# Altium PCB summing_circuit.PcbDoc
Units mm, origin at the board's own origin, x right, y up, seen from the top; angles counter-clockwise.
Board outline 127.77 x 76.7 mm, 2 copper layers (Top Layer, Bottom Layer); 101 components, 162 nets, 288 pads, 15 vias.
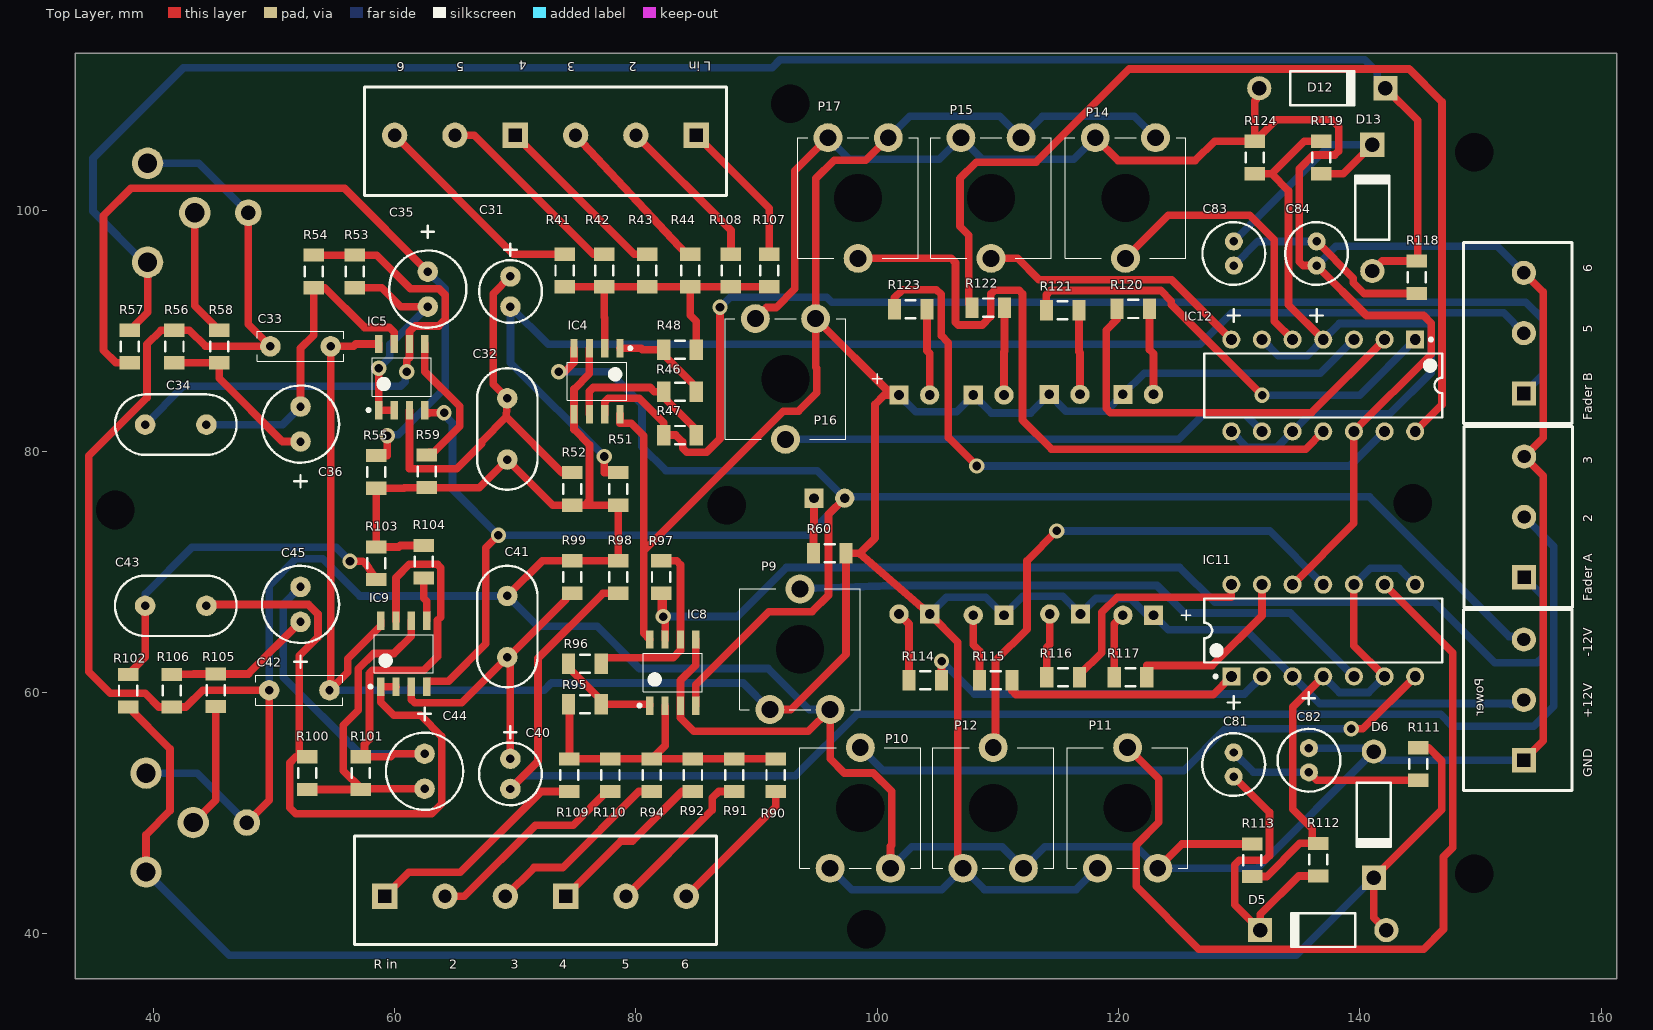
[diagram p0: Top Layer view]
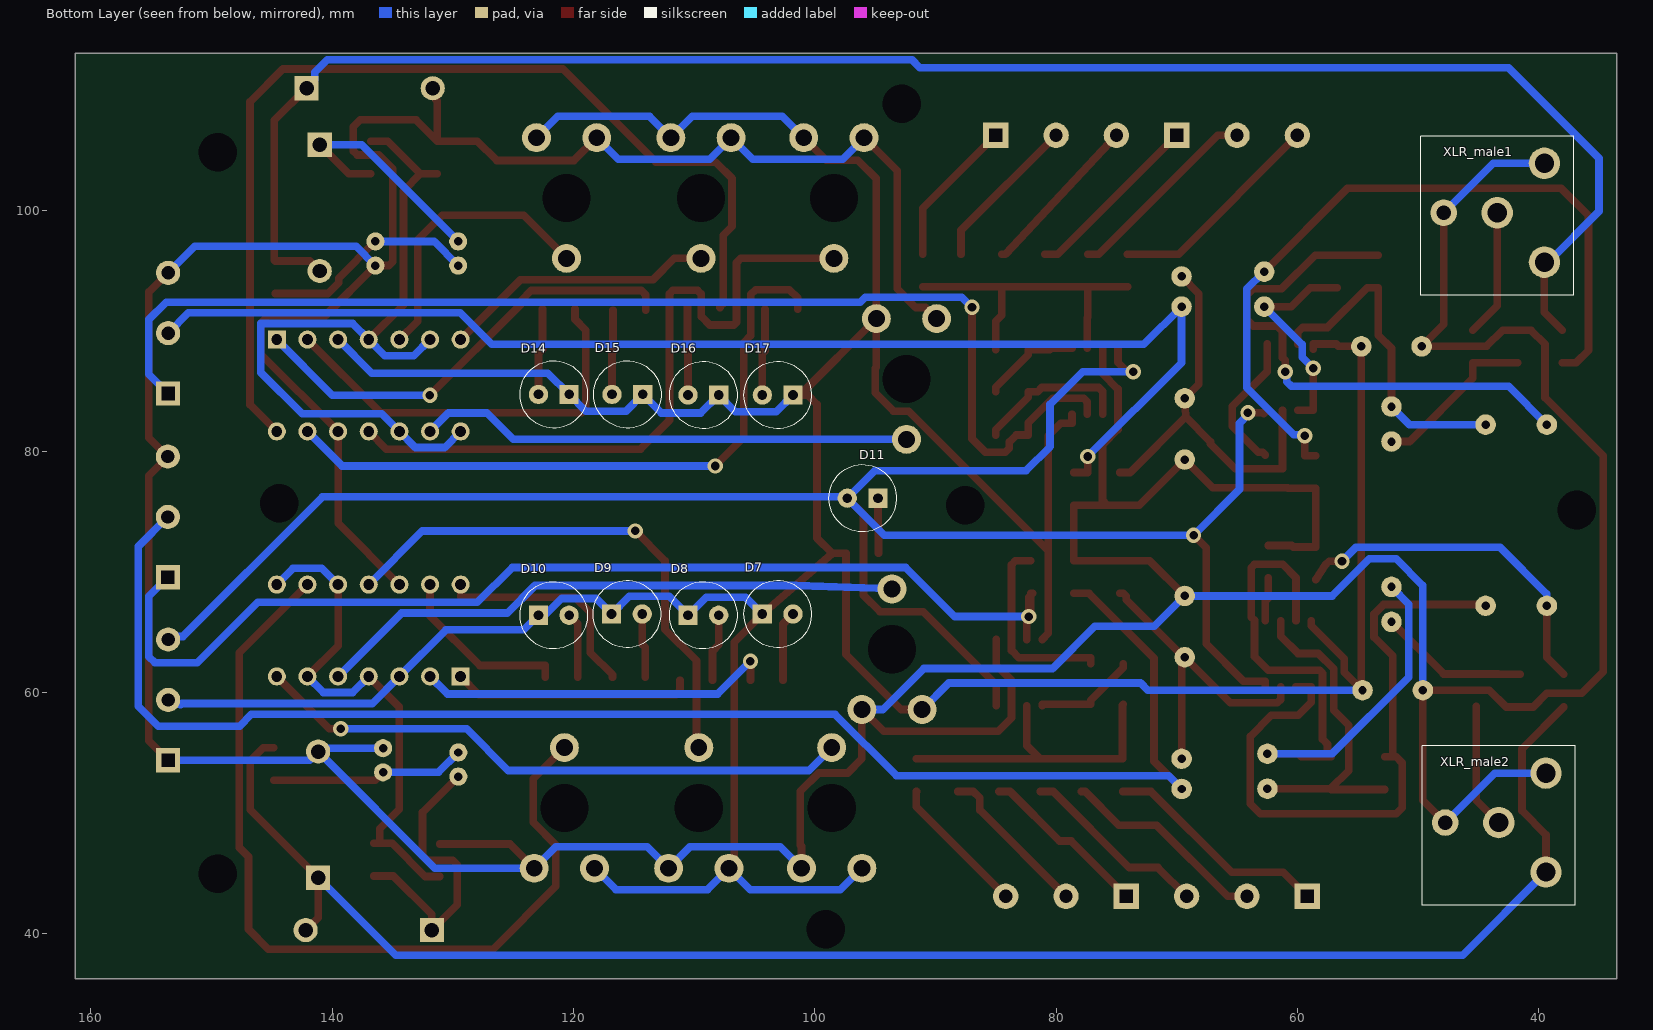
[diagram p1: Bottom Layer view, seen from below]

## Layer stack, top to bottom
Top Solder: solder mask 0.0102, Solder Resist, Dk 3.5
Top Layer: signal copper 0.0356
Dielectric 1: dielectric 0.32, FR-4, Dk 4.8
Bottom Layer: signal copper 0.0356
Bottom Solder: solder mask 0.0102, Solder Resist, Dk 3.5

## Board outline
33.528,113 161.3,113 161.3,36.3 33.528,36.3

## Design rules (kind name [scope] priority, off if disabled: settings)
Clearance [All] p1: gap=0.254 ignorepadtopadclearanceinfootprint=FALSE except(0: Arc-Hole Track-Hole SMDPad-Hole THPad-Hole Via-Hole Fill-Hole Poly-Hole Region-Hole Text-Hole)
Height [All] p1: minheight=0 maxheight=100 prefheight=12.7
HoleSize [All] p1: absolutevalues=TRUE maxlimit=5.08 minlimit=0.025 maxpercent=80.000 minpercent=20.000
PolygonConnect [All] p1: connectstyle=Relief reliefconductorwidth=0.254 reliefentries=4 polygonreliefangle="90 Angle" airgapwidth=0.254
RoutingVias [All] p1: holewidth=0.711 width=1.27 viastyle="Through Hole" minholewidth=0.711 minwidth=1.27 maxholewidth=0.711 maxwidth=1.27
SolderMaskExpansion [All] p1: expansion=0.102 istentingtop=FALSE
Width [All] p1: maxlimit=1.27 minlimit=0.254 preferedwidth=0.635 minimp=50.000000 maximp=50.000000 favimp=50.000000
28 further rules are at their usual default settings.

## Classes and differential pairs
component class summing_circuit: C31 C32 C33 C34 C35 C36 C40 C41 C42 C43 C44 C45 D11 IC4 IC5 IC8 IC9 "L in" Power R41 R42 R43 R44 R46 R47 R48 R51 R52 R53 R54 R55 R56 R57 R58 R59 R60 R90 R91 R92 R94 R95 R96 R97 R98 R99 R100 R101 R102 R103 R104 R105 R106 R107 R108 R109 R110 "R in" XLR_male1 XLR_male2
component class power_SUP: C81 C82 C83 C84 D5 D6 D7 D8 D9 D10 D12 D13 D14 D15 D16 D17 IC11 IC12 P9 P10 P11 P12 P14 P15 P16 P17 R111 R112 R113 R114 R115 R116 R117 R118 R119 R120 R121 R122 R123 R124

## Components (designator, comment, footprint, x,y, rotation, side; value= is the part's Value field where it differs from the comment)
C31 "Cap" "CAPACITOR 10UF" 69.6,92 r90 top value=10uF
C32 "Cap" "CAPACITOR 100PF" 69.34,79.321 r90 top value=100pF
C33 "Cap" "CAPACITOR 22NF, 47NF, 100NF" 49.7,88.7 r0 top value=100nF
C34 "Cap" "CAPACITOR 100PF" 39.32,82.219 r0 top value=100pF
C35 "Cap" "CAPACITOR 100UF" 62.748,92 r90 top value=22uF
C36 "Cap" "CAPACITOR 100UF" 52.2,83.714 r270 top value=22uF
C40 "Cap" "CAPACITOR 10UF" 69.594,52.016 r90 top value=10uF
C41 "Cap" "CAPACITOR 100PF" 69.34,68.018 r270 top value=100pF
C42 "Cap" "CAPACITOR 22NF, 47NF, 100NF" 49.6,60.2 r0 top value=100nF
C43 "Cap" "CAPACITOR 100PF" 44.4,67.2 r180 top value=100pF
C44 "Cap" "CAPACITOR 100UF" 62.482,52.037 r90 top value=100pF
C45 "Cap" "CAPACITOR 100UF" 52.2,68.768 r270 top value=22uF
C81 "Cap Pol2" "CAPACITOR 47UF" 129.548,53.042 r90 top value=47uF
C82 "Cap Pol2" "CAPACITOR 47UF" 135.784,53.396 r90 top value=47uF
C83 "Cap Pol2" "CAPACITOR 47UF" 129.561,97.401 r270 top value=47uF
C84 "Cap Pol2" "CAPACITOR 47UF" 136.419,97.401 r270 top value=47uF
D5 "Diode 1N4007" DO-41 136.973,40.318 r180 top
D6 "Diode 1N4007" DO-41 141.164,49.892 r270 top
D7 "LED1" LED 104.347,66.521 r180 bottom
D8 "LED1" LED 110.507,66.421 r180 bottom
D9 "LED1" LED 116.847,66.521 r180 bottom
D10 "LED1" LED 122.907,66.421 r180 bottom
D11 "LED1" LED 94.767,76.121 r0 bottom
D12 "Diode 1N4007" DO-41 136.9,110.1 r0 top
D13 "Diode 1N4007" DO-41 141.037,100.181 r90 top
D14 "LED1" LED 120.367,84.721 r0 bottom
D15 "LED1" LED 114.267,84.721 r0 bottom
D16 "LED1" LED 107.967,84.672 r0 bottom
D17 "LED1" LED 101.807,84.672 r0 bottom
"Fader A" "RPot" header_3 153.627,69.569 r90 top value=47k (schematic designator P2_5B)
"Fader B" "RPot" header_3 153.6,84.8 r90 top value=47k (schematic designator P2_5A)
IC4 "LM833DR2G" OPAMP_LM833 76.78,85.811 r270 top
IC5 "LM833DR2G" OPAMP_LM833 60.595,86.16 r90 top
IC8 "LM833DR2G" OPAMP_LM833 83.056,61.668 r90 top
IC9 "LM833DR2G" OPAMP_LM833 60.751,63.234 r90 top
IC11 "LM339N" OPAMP_LM339 136.973,65.152 r90 top
IC12 "LM339N" OPAMP_LM339 136.973,85.462 r270 top
"L in" "Header 6" HEADER_6 85,106.2 r180 top (schematic designator "PIN 14")
P9 "RPot" TRIMMER 93.6,63.6 r0 top value=47K
P10 "RPot" TRIMMER 98.6,50.446 r0 top value=47K
P11 "RPot" TRIMMER 120.756,50.446 r0 top value=47K
P12 "RPot" TRIMMER 109.617,50.446 r0 top value=47K
P14 "RPot" TRIMMER 120.574,101 r180 top value=47K
P15 "RPot" TRIMMER 109.435,101 r180 top value=47K
P16 "RPot" TRIMMER 92.4,86 r180 top value=47K
P17 "RPot" TRIMMER 98.418,101 r180 top value=47K
Power "Header 3" HEADER_3 153.6,54.4 r90 top (schematic designator "PIN 13")
R41 "Res2" C1206 74.082,95.001 r270 top value=1K
R42 "Res2" C1206 77.384,95.001 r270 top value=1K
R43 "Res2" C1206 80.94,95.001 r270 top value=1K
R44 "Res2" C1206 84.496,95.001 r270 top value=1K
R46 "Res2" C1206 83.662,84.938 r180 top value=1K
R47 "Res2" C1206 83.662,81.353 r180 top value=1K
R48 "Res2" C1206 83.662,88.436 r180 top value=10K
R51 "Res2" C1206 78.531,76.893 r90 top value=100K
R52 "Res2" C1206 74.721,76.893 r90 top value=10K
R53 "Res2" C1206 56.689,94.921 r90 top value=10K
R54 "Res2" C1206 53.294,94.921 r270 top value=10K
R55 "Res2" C1206 58.465,78.3 r90 top value=100K
R56 "Res2" C1206 41.748,88.7 r270 top value=100K
R57 "Res2" C1206 38.034,88.7 r90 top value=150
R58 "Res2" C1206 45.462,88.7 r90 top value=150
R59 "Res2" C1206 62.656,78.347 r90 top value=4k7
R60 "Res2" C1206 96.069,71.567 r180 top value=2k7
R90 "Res2" C1206 91.573,53.159 r90 top value=1K
R91 "Res2" C1206 88.152,53.159 r90 top value=1K
R92 "Res2" C1206 84.732,53.159 r90 top value=1K
R94 "Res2" C1206 81.311,53.159 r90 top value=1K
R95 "Res2" C1206 75.771,59.043 r0 top value=10K
R96 "Res2" C1206 75.771,62.41 r0 top value=1K
R97 "Res2" C1206 82.087,69.584 r270 top value=1K
R98 "Res2" C1206 78.531,69.584 r270 top value=100K
R99 "Res2" C1206 74.721,69.584 r270 top value=10K
R100 "Res2" C1206 52.75,53.328 r270 top value=10K
R101 "Res2" C1206 57.195,53.328 r90 top value=10K
R102 "Res2" C1206 37.907,60.164 r270 top value=150
R103 "Res2" C1206 58.465,70.727 r270 top value=100K
R104 "Res2" C1206 62.402,70.854 r270 top value=4k7
R105 "Res2" C1206 45.171,60.2 r270 top value=150
R106 "Res2" C1206 41.539,60.164 r90 top value=100K
R107 "Res2" C1206 91.054,95.001 r270 top value=1K
R108 "Res2" C1206 87.879,95.001 r270 top value=1K
R109 "Res2" C1206 74.469,53.159 r90 top value=1K
R110 "Res2" C1206 77.89,53.159 r90 top value=1K
R111 "Res2" C1206 144.847,54.083 r270 top value=10
R112 "Res2" C1206 136.549,46.156 r90 top value=100K
R113 "Res2" C1206 131.088,46.109 r90 top value=27k
R114 "Res2" C1206 103.985,61.023 r0 top value=470
R115 "Res2" C1206 109.827,61.023 r180 top value=470
R116 "Res2" C1206 115.415,61.277 r180 top value=470
R117 "Res2" C1206 121.003,61.277 r180 top value=470
R118 "Res2" C1206 144.72,94.431 r270 top value=10
R119 "Res2" C1206 136.817,104.363 r90 top value=100K
R120 "Res2" C1206 121.225,91.802 r180 top value=470
R121 "Res2" C1206 115.374,91.691 r0 top value=470
R122 "Res2" C1206 109.207,91.921 r0 top value=470
R123 "Res2" C1206 102.775,91.776 r0 top value=470
R124 "Res2" C1206 131.282,104.363 r90 top value=27k
"R in" "Header 6" HEADER_6 59.177,43.122 r0 top (schematic designator "PIN 15")
XLR_male1 "XLR_male" XLR_MALE_NEUTRIK_NC3_MAV 39.624,99.779 r270 bottom
XLR_male2 "XLR_male" XLR_MALE_NEUTRIK_NC3_MAV 39.497,49.233 r270 bottom

## Footprints (in the part's own frame and the unit in brackets; to place one, negate y for a bottom-side part, rotate by r counter-clockwise, add the part's x,y. Pads: shape width x height; smd on the part's side, far side on the other; paste and mask are expansions set on the pad)
C1206 [mm] "Chip Capacitor, Body 3.2x1.6mm, IPC High Density"
  rect 1.1x1.7 smd: 1(-1.35,0) 2(1.35,0)
  silkscreen extent -0.4,-0.75 0.4,0.75, body extent -1.7,-0.9 1.7,0.9, height 1.3
"CAPACITOR 10UF" [mm]
  round 1.7 hole 0.7: 1(0,0) 2(2.5,0)
  silkscreen extent -1.35,-2.6 5.21,2.6
"CAPACITOR 22NF, 47NF, 100NF" [mm]
  round 1.7 hole 0.7: 1(0,0) 2(5,0)
  silkscreen extent -1.1,-1.25 6.1,1.25
"CAPACITOR 47UF" [mm]
  round 1.5 hole 0.7: 1(0,0) 2(2,0)
  silkscreen extent -1.6,-2.6 6.65,2.6
"CAPACITOR 100PF" [mm]
  round 1.7 hole 0.7: 1(0,0) 2(5.08,0)
  silkscreen extent -2.5,-2.5 7.58,2.5
"CAPACITOR 100UF" [mm]
  round 1.7 hole 0.7: 1(0,0) 2(2.9,0)
  silkscreen extent -1.75,-3.2 6.71,3.2
DO-41 [mm] "Diode, Axial; Body 5.2 x 2.7 mm (LxDia. max), Lead Dia. 0.86 mm (max)"
  round 2 hole 1.2: 1(-5.23,0)
  rect 2x2 hole 1.2: 2(5.23,0)
  silkscreen extent -2.65,-1.4 2.75,1.4
header_3 [mm]
  rect 2x2 hole 1.1 square: 1(0,0)
  round 2 hole 1.1: 2(5,0) 3(10,0)
  silkscreen extent -2.5,-4 12.5,5, body extent -2.65,-4 12.5,4, height 10
HEADER_3 [mm]
  rect 2x2 hole 1.1 square: 1(0,0)
  round 2 hole 1.1: 2(5,0) 3(10,0)
  silkscreen extent -2.5,-4 12.5,5, body extent -2.65,-4 12.5,4, height 10
HEADER_6 [mm]
  rect 2.1x2.1 hole 1.1 square: 1(0,0) 4(15,0)
  round 2.1 hole 1.1: 2(5,0) 3(10,0) 5(20,0) 6(25,0)
  silkscreen extent -2.5,-4 27.5,5, body extent -2.65,-4 27.5,4, height 10
LED [mm]
  rect 1.6x1.6 hole 0.8: 1(0,0)
  round 1.6 hole 0.8: 2(2.54,0)
  silkscreen extent -1.52,-2.79 4.06,2.79, body extent -1.66,-2.93 3.65,2.93, height 14.18
OPAMP_LM339 [mm] "DIP, 14-Leads, Body 19.7x6.6mm, Pitch 2.54mm"
  rect 1.5x1.5 hole 0.9: 1(-3.81,7.62)
  round 1.5 hole 0.9: 2(-3.81,5.08) 3(-3.81,2.54) 4(-3.81,0) 5(-3.81,-2.54) 6(-3.81,-5.08) 7(-3.81,-7.62) 8(3.81,-7.62) 9(3.81,-5.08) 10(3.81,-2.54) 11(3.81,0) 12(3.81,2.54) 13(3.81,5.08) 14(3.81,7.62)
  silkscreen extent -3.93,-9.85 2.65,9.85, body extent -3.95,-9.85 3.95,9.85, height 5.08
OPAMP_LM833 [mm] "SOIC, 8-Leads, Body 4.9x3.9mm, Pitch 1.27mm"
  rect 1.52x0.6 smd: 1(-2.74,1.905) 2(-2.74,0.635) 3(-2.74,-0.635) 4(-2.74,-1.905) 5(2.74,-1.905) 6(2.74,-0.635) 7(2.74,0.635) 8(2.74,1.905)
  silkscreen extent -2.86,-2.45 1.58,2.88, body extent -1.95,-2.45 1.95,2.45, height 1.75
TRIMMER [mm]
  round 2.4 hole 1.4: 1(-2.5,-5) 2(2.5,-5) 3(0,5)
  round 0 hole 4 unplated: ""(0,0)
  silkscreen extent -5,-5 5,5, body extent -5.15,-5.15 5.15,5.15, height 6.1
XLR_MALE_NEUTRIK_NC3_MAV [mm]
  round 2.6 hole 1.6: 1(-4.1,0.1) 2(4.1,0.1) 3(0,-3.81)
  round 2.2 hole 1.2: 1(0,-8.25)
  silkscreen extent -6.35,-10.16 6.86,2.54, body extent -12.55,-14.67 12.45,12.63, height 27.21

## Part data
C31 C32 C34 C35 C40 C41 C43 C44: "Capacitor", LatestRevisionDate=17-Jul-2002, LatestRevisionNote="Re-released for DXP Platform.", PackageDescription="Radial Cap, Thru-Hole; 2 Leads; 0.3 in Pin Spacing", PackageReference=RAD-0.3, Published=8-Jun-2000, Publisher="Altium Limited"
C33 C42: library part Cap_3, "Capacitor", LatestRevisionDate=17-Jul-2002, LatestRevisionNote="Re-released for DXP Platform.", PackageDescription="Radial Cap, Thru-Hole; 2 Leads; 0.3 in Pin Spacing", PackageReference=RAD-0.3, Published=8-Jun-2000, Publisher="Altium Limited"
C36 C45: library part Cap_5, "Capacitor", LatestRevisionDate=17-Jul-2002, LatestRevisionNote="Re-released for DXP Platform.", PackageDescription="Radial Cap, Thru-Hole; 2 Leads; 0.3 in Pin Spacing", PackageReference=RAD-0.3, Published=8-Jun-2000, Publisher="Altium Limited"
C81 C82 C83 C84: "electrolytic", LatestRevisionDate=17-Jul-2002, LatestRevisionNote="Re-released for DXP Platform.", PackageDescription="Polarized Capacitor; 2 Leads", PackageReference=POLAR0.8, Published=8-Jun-2000, Publisher="Altium Limited"
D5 D6 D12 D13: "1 Amp General Purpose Rectifier", Code_JEDEC=DO-204-AL, ComponentLink1Description="Manufacturer Link", ComponentLink1URL=http://www.fairchildsemi.com/, ComponentLink2Description=Datasheet, ComponentLink2URL=http://www.fairchildsemi.com/ds/1N%2F1N4001.pdf, DatasheetVersion=1998, LatestRevisionDate=17-Jul-2002, LatestRevisionNote="Re-released for DXP Platform.", PackageDescription="Diode, Axial; Body 5.2 x 2.7 mm (LxDia. max), Lead Dia. 0.86 mm (max)", PackageReference=DO-41, PackageVersion=Aug-1999, Published=8-Jun-2000, Publisher="Altium Limited"
D7 D8 D9 D10 D11 D14 D15 D16 D17: "Typical RED GaAs LED", LatestRevisionDate=08-Jul-2005, LatestRevisionNote="Mech Layer 1 removed.", PackageDescription="LED; 2 Leads", PackageReference=LED-1, Published=8-Jun-2000, Publisher="Altium Limited"
"Fader A" "Fader B": "Potentiometer", LatestRevisionDate=17-Jul-2002, LatestRevisionNote="Re-released for DXP Platform.", PackageDescription="Variable Resistor, Thru-Hole; 3 Leads", PackageReference=VR5, Published=8-Jun-2000, Publisher="Altium Limited", Set Position=0.5, Sim Note="Enter the Resistance value and the set point into parameter fields."
IC4 IC5 IC8 IC9: library part opamp_LM833, "Low Noise, Audio Dual Operational Amplifier, -40 to 85 degC, 8-Pin SOIC, Pb-Free, Tape and Reel", Manufacturer="On Semiconductor", ComponentLink1Description="Manufacturer URL", ComponentLink1URL=http://www.onsemi.com/, ComponentLink2Description=Datasheet, ComponentLink2URL=http://www.onsemi.cn/pub_link/Collateral/LM833-D.PDF, ComponentLink3Description="Package Specification", ComponentLink3URL=http://www.onsemi.com/pub_link/Collateral/751-07.PDF, DatasheetVersion="Rev. 6", GBW Typ (MHz)=15, Mounting Technology="Surface Mount", PackageDescription="8-Pin Small Outline Integrated Circuit, Body 4.9 x 3.9 mm, Pitch 1.27 mm", PackageReference=SOIC-8-751-07, PackageVersion="Rev. AK, 02/2011", Packing="Tape and Reel", PartNumber=LM833DR2G, RoHS=TRUE, SR Typ (V/uS)=7
IC11 IC12: library part opamp_LM339, "Low Power Low Offset Voltage Quad Comparator, 14-pin MDIP", Manufacturer="Texas Instruments", Package Reference=N0014A, PackageTopMarking=NSUZXYYTTE#*LM339N, PowerWise=N, Code_JEDEC=MS-001-AA, ComponentLink1Description="Datasheet URL", ComponentLink1URL=http://www.ti.com/general/docs/lit/getliterature.tsp?genericPartNumber=LM339&fileType=pdf, CompType=Amplifiers, PackageDescription="MDIP, .750 x .250 x.130in, 14 Lead, .100in Pitch", PinCount=14, RoHS=N
"L in" "R in": "Header, 6-Pin", LatestRevisionDate=17-Jul-2002, LatestRevisionNote="Re-released for DXP Platform.", Publisher="Altium Limited"
P9 P10 P11 P12 P14 P15 P16 P17: library part RPot_1, "Potentiometer", LatestRevisionDate=17-Jul-2002, LatestRevisionNote="Re-released for DXP Platform.", PackageDescription="Variable Resistor, Thru-Hole; 3 Leads", PackageReference=VR5, Published=8-Jun-2000, Publisher="Altium Limited", Set Position=0.5, Sim Note="Enter the Resistance value and the set point into parameter fields."
Power: "Header, 3-Pin", LatestRevisionDate=17-Jul-2002, LatestRevisionNote="Re-released for DXP Platform.", Publisher="Altium Limited"
R41 R42 R43 R44 R46 R47 R57 R58 R59 R90 R91 R92 R94 R96 R97 R102 R104 R105 R107 R108 R109 R110 R113 R124: "Resistor", LatestRevisionDate=17-Jul-2002, LatestRevisionNote="Re-released for DXP Platform.", PackageDescription="Axial Device, Thru-Hole; 2 Leads; 0.4 in Pin Spacing", PackageReference=AXIAL-0.4, Published=8-Jun-2000, Publisher="Altium Limited"
R48 R52 R53 R54 R95 R99 R100 R101: library part Res2_3, "Resistor", LatestRevisionDate=17-Jul-2002, LatestRevisionNote="Re-released for DXP Platform.", PackageDescription="Axial Device, Thru-Hole; 2 Leads; 0.4 in Pin Spacing", PackageReference=AXIAL-0.4, Published=8-Jun-2000, Publisher="Altium Limited"
R51 R55 R56 R98 R103 R106 R112 R119: library part Res2_5, "Resistor", LatestRevisionDate=17-Jul-2002, LatestRevisionNote="Re-released for DXP Platform.", PackageDescription="Axial Device, Thru-Hole; 2 Leads; 0.4 in Pin Spacing", PackageReference=AXIAL-0.4, Published=8-Jun-2000, Publisher="Altium Limited"
R60: library part Res_16, "Resistor", LatestRevisionDate=17-Jul-2002, LatestRevisionNote="Re-released for DXP Platform.", PackageDescription="Axial Device, Thru-Hole; 2 Leads; 0.4 in Pin Spacing", PackageReference=AXIAL-0.4, Published=8-Jun-2000, Publisher="Altium Limited"
R111 R118: library part Res2_2, "Resistor", LatestRevisionDate=17-Jul-2002, LatestRevisionNote="Re-released for DXP Platform.", PackageDescription="Axial Device, Thru-Hole; 2 Leads; 0.4 in Pin Spacing", PackageReference=AXIAL-0.4, Published=8-Jun-2000, Publisher="Altium Limited"
R114 R115 R116 R117 R120 R121 R122 R123: library part Res2_13, "Resistor", LatestRevisionDate=17-Jul-2002, LatestRevisionNote="Re-released for DXP Platform.", PackageDescription="Axial Device, Thru-Hole; 2 Leads; 0.4 in Pin Spacing", PackageReference=AXIAL-0.4, Published=8-Jun-2000, Publisher="Altium Limited"

## Free pads (board coordinates)
  round 1.524 hole 3.2 unplated: 7(149.5,45) 9(149.5,104.8) 14(99.1,40.4) 15(144.4,75.7) 16(92.8,108.8) 18(36.83,75.141) 19(87.52,75.52)

## Via types
v1: diameter 1.27, hole 0.711, Top Layer to Bottom Layer, 15 vias

## Nets (pads, with @x,y where several pads share a name; then routed paths per layer and width w, separated by ;. In a path a pad name is that pad's centre, name@x,y a point inside that pad or via, vN(x,y) a via of type N, cw(c..) or ccw(c..) an arc to the next point about the centre after c; other vN are vias at no path point)
GND: "Fader A.3" "Fader B.3" C32.1 C33.1 C41.1 C42.1 C82.2 C84.2 D6.1 D12.1 IC4.3 IC4.5 IC8.3 IC8.5 IC11.12 IC12.12 P9.2 P10.2 P11.2 P12.2 P14.2 P15.2 P16.2 P17.2 Power.1 R51.1 R52.1 R55.1 R56.1 R59.1 R98.1 R99.1 R103.1 R104.1 R106.1 R113.2 R124.2 XLR_male1.1 XLR_male2.1 | length 519.1
  Top Layer w0.635: XLR_male2.1@47.747,49.233 49.6,51.086 C42.1 44.083,60.2 42.697,58.814 R106.1 40.462,58.814 39.332,59.944 36.424,59.944 34.646,61.722 34.646,79.629 39.472,84.455 39.472,88.882 40.64,90.05 R56.1 42.977,90.05 44.327,88.7 C33.1 47.874,90.526 XLR_male1.1@47.874,99.779 ; R104.1 60.477,72.204 60.35,72.077 R103.1 R55.1 60.775,76.95 60.822,76.997 R59.1 67.016,76.997 C32.1 73.118,75.543 R52.1 75.747,75.543 ; C41.1 72.256,70.934 R99.1 R98.1 R51.1 75.747,75.543 ; IC4.3 76.145,86.436 74.875,85.166 IC4.5 74.875,81.818 76.149,80.543 76.149,75.946 75.747,75.543 ; IC8.5 84.961,62.281 83.691,61.011 IC8.3 83.691,57.912 84.809,56.794 94.294,56.794 P9.2 96.1,54.508 97.268,53.34 99.67,53.34 101.194,51.816 101.194,47.371 101.1,47.277 P10.2 ; P16.2 90.823,91.923 91.618,91.923 93.167,93.472 93.167,103.25 P17.2 ; P14.2 119.959,104.115 126.367,104.115 127.965,105.713 R124.2 ; P11.2 125.27,47.459 R113.2 ; D12.1 131.409,109.839 131.409,109.172 131.282,109.045 R124.2 ; IC11.12 139.513,74.042 IC12.12 145.923,88.061 145.923,90.627 145.288,91.262 140.558,91.262 C84.2 135.307,95.401 134.976,95.733 134.976,103.403 136.144,104.572 137.922,104.572 138.252,104.902 138.252,106.909 137.668,107.493 133.062,107.493 R124.2 ; Power.1 155.219,56.019 155.219,77.977 153.627,79.569 155.194,81.136 155.194,93.206 153.6,94.8
  Bottom Layer w0.635: XLR_male2.1@39.397,53.333 43.647,53.333 XLR_male2.1@47.747,49.233 ; XLR_male1.1@39.524,103.879 43.774,103.879 XLR_male1.1@47.874,99.779 ; C42.1 49.6,68.879 51.816,71.095 54.033,71.095 57.11,68.018 C41.1 71.858,65.5 76.8,65.5 80.3,62 90.961,62 94.361,58.6 P9.2 ; P17.2 97.701,104.216 105.151,104.216 P15.2 108.719,104.216 116.29,104.216 P14.2 ; P10.2 102.872,47.219 110.344,47.219 P12.2 113.89,47.219 121.484,47.219 P11.2 131.488,45.446 D6.1 ; C82.2 140.11,55.396 140.123,55.383 140.903,55.383 D6.1 ; C84.2 138.018,97 151.4,97 153.6,94.8 ; Power.1 141.886,54.4 D6.1
GND_Chasie: 
Net_1: 
Net_3: 
NetC1_1: 
NetC1_2: 
NetC2_1: 
NetC2_2: 
NetC3_1: 
NetC4_1: 
NetC4_2: 
NetC5_1: 
NetC21_2: 
NetC22_1: 
NetC22_2: 
NetC23_1: 
NetC23_2: 
NetC24_1: 
NetC24_2: 
NetC25_1: 
NetC26_1: 
NetC27_1: 
NetC27_2: 
NetC28_1: 
NetC31_1: "Fader B.2" C31.1 R51.2 | length 105.2
  Top Layer w0.635: v1(77.368,79.578) 77.368,78.243 R51.2
  Bottom Layer w0.635: v1(77.368,79.578) 69.6,87.347 C31.1 72.725,88.875 126.771,88.875 129.379,91.482 151.918,91.482 153.6,89.8
NetC31_2: C31.2 C32.2 IC5.3 R52.2 | length 34.9
  Top Layer w0.635: IC5.3 61.23,78.562 65.15,78.562 67.207,80.62 67.207,80.796 69.265,82.854 ; C31.2 68.174,93.074 68.174,85.567 C32.2 69.265,82.854 ; R52.2 73.875,78.243 69.265,82.854
NetC34_1: C34.1 IC5.6 R53.2 R54.1 | length 45
  Top Layer w0.635: R54.1 R53.2 58.517,96.271 61.316,93.472 63.678,93.472 64.186,92.964 64.186,90.932 63.652,90.399 61.713,90.399 61.23,89.916 IC5.6 61.23,87.773 61,87.543 v1(61,86.6)
  Bottom Layer w0.635: C34.1 42.496,85.395 60.486,85.395 60.878,85.787 60.878,86.478 v1(61,86.6)
NetC34_2: C34.2 C36.1 IC5.7 R54.2 | length 27.9
  Top Layer w0.635: C36.1 52.2,88.547 53.294,89.642 R54.2 54.206,93.571 57.506,90.272 59.563,90.272 59.96,89.875 IC5.7
  Bottom Layer w0.635: C34.2 50.704,82.219 C36.1
NetC35_1: C35.1 IC5.1 IC5.2 R53.1 | length 18.2
  Top Layer w0.635: R53.1 58.928,93.571 60.499,92 C35.1 ; v1(58.69,86.89) IC5.1 IC5.2
  Bottom Layer w0.635: v1(58.69,86.89) 59.6,87.8 59.6,88.852 C35.1
NetC35_2: C35.2 R55.2 R57.1 | length 63.7
  Top Layer w0.635: R57.1 36.907,87.35 35.865,88.392 35.865,99.517 38.151,101.803 55.844,101.803 C35.2 ; R55.2 59.385,79.65 v1(59.385,81.305)
  Bottom Layer w0.635: v1(59.385,81.305) 59.463,81.383 60.283,81.383 64.186,85.286 64.186,93.462 C35.2
NetC36_2: C36.2 R56.2 R58.1 | length 13.9
  Top Layer w0.635: R56.2 R58.1 45.462,86.057 50.704,80.814 C36.2
NetC40_1: "Fader A.2" C40.1 R98.2 | length 127.5
  Top Layer w0.635: C40.1 71.882,54.304 71.882,62.84 77.277,68.234 R98.2
  Bottom Layer w0.635: C40.1 70.678,53.1 93.224,53.1 98.33,58.207 146.695,58.207 147.676,57.226 154.432,57.226 156.083,58.877 156.083,72.113 153.627,74.569
NetC40_2: C40.2 C41.2 IC9.3 R99.2 | length 27
  Top Layer w0.635: IC9.3 61.386,59.436 61.665,59.157 65.559,59.157 C41.2 ; C40.2 69.594,62.396 69.34,62.65 C41.2 ; R99.2 74.421,68.234 74.188,68.002 74.188,67.702 69.424,62.938 C41.2
NetC43_1: C43.1 IC9.1 IC9.2 R100.1 | length 55
  Top Layer w0.635: C43.1 44.4,67.31 52.857,67.31 53.645,66.523 53.645,64.592 52.095,63.043 R100.1@52.095,54.678 ; R100.1 R100.1@52.095,54.678 ; IC9.2 IC9.1 58.846,59.214 59.944,58.115 62.154,58.115 63.906,56.363 63.906,50.8 63.068,49.962 51.816,49.962 51.308,50.47 51.308,54.17 51.816,54.678 R100.1@52.095,54.678
NetC43_2: C43.2 R102.1 R103.2 | length 29.3
  Top Layer w0.635: R102.1 39.32,62.927 C43.2 ; v1(56.3,70.9) 57.37,70.9 57.633,70.637 R103.2
  Bottom Layer w0.635: C43.2 39.32,68.174 43.205,72.06 55.14,72.06 v1(56.3,70.9)
NetC44_1: C44.1 IC9.6 R100.2 R101.1 | length 27.6
  Top Layer w0.635: R100.2 R101.1 R101.1@57.259,52.037 ; IC9.6 61.386,64.688 59.944,63.246 58.268,63.246 56.998,61.976 56.998,58.547 55.753,57.302 55.753,53.543 R101.1@57.259,52.037 ; C44.1 R101.1@57.259,52.037
NetC44_2: C44.2 C45.1 IC9.7 R101.2 | length 56.4
  Top Layer w0.635: R101.2 R101.2@57.506,54.678 ; IC9.7 60.116,69.539 61.214,70.637 63.551,70.637 63.83,70.358 63.83,66.269 63.551,65.989 63.551,62.992 62.408,61.849 58.166,61.849 57.912,61.595 57.912,56.134 57.506,55.728 R101.2@57.506,54.678 ; C44.2 59.949,54.937 59.69,54.678 R101.2@57.506,54.678
  Bottom Layer w0.635: C45.1 50.775,67.343 50.775,61.29 57.128,54.937 C44.2
NetC45_2: C45.2 R105.1 R106.2 | length 12.5
  Top Layer w0.635: R106.2 43.332,61.514 43.368,61.55 R105.1 47.882,61.55 C45.2
NetC51_1: 
NetC51_2: 
NetC52_2: 
NetC53_1: 
NetC53_2: 
NetC54_1: 
NetC54_2: 
NetC55_1: 
NetC55_2: 
NetC56_1: 
NetC57_1: 
NetC58_1: 
NetC58_2: 
NetC59_1: 
NetC60_1: 
NetC60_2: 
NetC61_2: 
NetC62_1: 
NetC62_2: 
NetC63_1: 
NetC63_2: 
NetC64_1: 
NetC64_2: 
NetC65_1: 
NetC66_1: 
NetC67_1: 
NetC67_2: 
NetC68_1: 
NetC71_1: 
NetC72_2: 
NetC81_1: C81.1 D5.2 R112.1 | length 24.7
  Top Layer w0.635: C81.1 132.512,50.079 132.512,46.482 132.131,46.101 130.023,46.101 129.642,45.72 129.642,42.42 D5.2 131.743,41.617 134.932,44.806 R112.1
NetC81_2: C81.2 C82.1 R111.2 | length 16.3
  Top Layer w0.635: C82.1 136.447,52.733 R111.2
  Bottom Layer w0.635: C81.2 131.195,53.396 C82.1
NetC83_1: C83.1 D13.2 R119.1 | length 20
  Top Layer w0.635: R119.1 138.639,103.013 D13.2
  Bottom Layer w0.635: C83.1 137.571,105.411 D13.2
NetC83_2: C83.2 C84.1 R118.2 | length 18
  Top Layer w0.635: C84.1 139.471,94.349 139.471,93.98 140.37,93.081 R118.2
  Bottom Layer w0.635: C83.2 131.561,97.401 C84.1
NetD1_2: 
NetD3_2: 
NetD5_1: D5.1 D6.2 R102.2 R111.1 XLR_male2.2 | length 142.4
  Top Layer w0.635: R102.2 41.377,55.344 41.377,50.216 39.397,48.236 XLR_male2.2 ; D5.1 141.164,41.357 D6.2 146.807,50.305 146.807,54.336 145.71,55.433 R111.1
  Bottom Layer w0.635: XLR_male2.2 46.301,38.228 134.731,38.228 D6.2
NetD7_2: D7.2 R114.1 | length 5.8
  Top Layer w0.635: D7.2 102.635,65.693 R114.1
NetD8_2: D8.2 R115.2 | length 5.6
  Top Layer w0.635: D8.2 107.967,63.959 108.477,63.449 R115.2
NetD9_2: D9.2 R116.2 | length 5.3
  Top Layer w0.635: R116.2 114.065,63.754 114.307,63.996 D9.2
NetD10_2: D10.2 R117.2 | length 5.4
  Top Layer w0.635: R117.2 119.653,65.707 D10.2
NetD11_1: D11.1 R60.2 | length 4.6
  Top Layer w0.635: R60.2 94.719,73.812 94.767,73.86 D11.1
NetD12_2: D12.2 D13.1 R57.2 R118.1 XLR_male1.2 | length 148.1
  Top Layer w0.635: R57.2 39.524,91.54 XLR_male1.2 ; D13.1 141.867,95.781 144.4,95.781 R118.1 144.8,95.861 144.8,107.43 D12.2
  Bottom Layer w0.635: XLR_male1.2 39.221,95.679 35,99.9 35,104.3 42.5,111.8 91.294,111.8 91.945,112.451 140.425,112.451 141.448,111.428 141.448,110.782 141.551,110.679 D12.2@142.203,110.679
NetD14_2: D14.2 R120.1 | length 7.2
  Top Layer w0.635: R120.1 122.575,88.419 122.907,88.087 D14.2
NetD15_2: D15.2 R121.2 | length 7
  Top Layer w0.635: R121.2 116.724,88.247 116.807,88.163 D15.2
NetD16_2: D16.2 R122.2 | length 7.3
  Top Layer w0.635: D16.2 110.507,88.265 110.557,88.315 R122.2
NetD17_2: D17.2 R123.2 | length 7.2
  Top Layer w0.635: R123.2 104.125,88.335 104.347,88.113 D17.2
NetF1_1: 
NetF1_2: 
NetIC1_1: 
NetIC1_2: 
NetIC1_6: 
NetIC1_7: 
NetIC2_2: 
NetIC2_3: 
NetIC2_6: 
NetIC3_6: 
NetIC4_1: IC4.1 R46.1 R48.2 | length 8.3
  Top Layer w0.635: IC4.1 80.416,88.551 80.531,88.436 R48.2 82.312,88.019 85.012,85.319 R46.1
NetIC4_2: IC4.2 R41.2 R42.2 R43.2 R44.2 R48.1 R107.2 R108.2 | length 27.5
  Top Layer w0.635: R41.2 R42.2 ; IC4.2 77.415,91.084 77.385,91.114 R42.2 ; R48.1 85.012,90.78 84.497,91.295 R44.2 ; R107.2 R108.2 R44.2 ; R42.2 R43.2 R44.2
NetIC4_6: IC4.6 R46.2 R47.1 | length 13
  Top Layer w0.635: IC4.6 76.145,84.963 76.475,85.293 81.178,85.293 81.534,84.938 R46.2 82.312,84.488 85.012,81.788 R47.1
NetIC4_7: "Fader B.1" IC4.7 R47.2 | length 101
  Top Layer w0.635: IC4.7 77.415,84.095 77.724,84.404 80.289,84.404 82.312,82.381 R47.2 83.312,81.353 83.891,80.774 83.891,80.264 84.223,79.931 85.852,79.931 86.97,81.049 v1(86.97,91.948)
  Bottom Layer w0.635: v1(86.97,91.948) 87.808,92.786 95.809,92.786 96.224,92.371 153.755,92.371 155.194,90.932 155.194,86.394 153.6,84.8
NetIC5_5: IC5.5 R59.2 | length 11.7
  Top Layer w0.635: IC5.5 62.5,86.623 65.4,83.723 65.4,82.1 63.23,79.93 62.888,79.93 R59.2
NetIC6_6: 
NetIC7_6: 
NetIC8_1: IC8.1 R95.2 R96.1 | length 8.6
  Top Layer w0.635: R96.1 74.421,62.06 77.121,59.36 R95.2 81.134,59.043 81.151,59.026 IC8.1
NetIC8_2: IC8.2 R90.2 R91.2 R92.2 R94.2 R95.1 R109.2 R110.2 | length 26.6
  Top Layer w0.635: R95.1 74.5,58.964 74.5,54.54 R109.2 R110.2 R94.2 ; IC8.2 82.421,55.619 R94.2 ; R90.2 R91.2 R92.2 R94.2
NetIC8_6: IC8.6 R96.2 R97.1 | length 16.2
  Top Layer w0.635: R96.2 77.121,62.89 83.081,62.89 83.691,63.5 IC8.6 83.691,70.612 83.369,70.934 R97.1
NetIC8_7: "Fader A.1" IC8.7 R97.2 | length 91.5
  Top Layer w0.635: v1(82.254,66.309) 82.254,67.921 81.94,68.234 R97.2 82.087,66.476 82.421,66.142 IC8.7
  Bottom Layer w0.635: v1(82.254,66.309) 88.393,66.309 92.456,70.372 125.09,70.372 127.974,67.488 146.177,67.488 151.181,62.484 154.686,62.484 155.194,62.992 155.194,68.002 153.627,69.569
NetIC9_5: IC9.5 R104.2 | length 3.6
  Top Layer w0.635: R104.2 62.402,67.843 62.656,67.589 IC9.5
NetIC11_1: IC11.1 R115.1 | length 19.8
  Top Layer w0.635: R115.1 111.177,60.171 111.506,59.842 127.854,59.842 IC11.1
NetIC11_2: IC11.2 R114.2 | length 29.9
  Top Layer w0.635: R114.2 v1(105.335,62.611)
  Bottom Layer w0.635: v1(105.335,62.611) 108.053,59.893 130.445,59.893 IC11.2
NetIC11_4: IC11.4 IC11.6 IC11.8 IC11.10 R112.2 R113.1 | length 43.2
  Top Layer w0.635: R113.1 132.287,44.759 135.034,47.506 R112.2@136.068,47.506 ; R112.2 R112.2@136.068,47.506 ; IC11.4 134.442,58.811 134.442,50.343 136.068,48.717 R112.2@136.068,47.506 ; IC11.10 139.513,63.882 IC11.6
  Bottom Layer w0.635: IC11.4 138.295,60.02 140.732,60.02 IC11.6 ; IC11.10 140.859,70.307 143.248,70.307 IC11.8
NetIC11_5: IC11.5 P9.3 | length 49
  Bottom Layer w0.635: P9.3 101.549,68.885 123.194,68.885 125.48,66.599 134.257,66.599 IC11.5
NetIC11_7: IC11.7 P10.3 | length 50
  Top Layer w0.635: v1(139.3,57) 140.251,57 IC11.7
  Bottom Layer w0.635: P10.3 100.502,53.543 125.398,53.543 128.855,57 v1(139.3,57)
NetIC11_9: IC11.9 P11.3 | length 72.9
  Top Layer w0.635: P11.3 123.342,52.86 123.342,49.251 121.463,47.371 121.463,43.942 126.67,38.735 145.288,38.735 146.939,40.386 146.939,46.406 147.701,47.168 147.701,63.314 IC11.9
NetIC11_11: IC11.11 P12.3 | length 44.1
  Top Layer w0.635: P12.3 109.8,55.629 109.8,62.632 112.42,65.253 112.42,70.942 v1(114.884,73.406)
  Bottom Layer w0.635: v1(114.884,73.406) 132.529,73.406 IC11.11
NetIC11_13: IC11.13 R117.1 | length 14.8
  Top Layer w0.635: R117.1 122.353,62.257 127.763,62.257 131.893,66.387 IC11.13
NetIC11_14: IC11.14 R116.1 | length 18.4
  Top Layer w0.635: R116.1 116.765,61.468 118.618,63.321 118.618,66.65 119.888,67.92 129.353,67.92 IC11.14
NetIC12_1: IC12.1 R121.1 | length 37.7
  Top Layer w0.635: R121.1 114.024,92.964 114.399,93.339 123.5,93.339 124.384,92.456 124.384,92.177 v1(131.902,84.658)
  Bottom Layer w0.635: v1(131.902,84.658) 139.98,84.658 IC12.1
NetIC12_2: IC12.2 R120.2 | length 34.3
  Top Layer w0.635: R120.2 119.875,90.945 118.974,90.043 118.974,83.566 119.329,83.21 135.992,83.21 IC12.2
NetIC12_4: IC12.4 IC12.6 IC12.8 IC12.10 R119.2 R124.1 | length 61.6
  Top Layer w0.635: R124.1 132.69,103.013 ; R119.2 135.39,105.713 132.69,103.013 ; IC12.4 134.087,92.158 134.087,101.616 132.69,103.013
  Bottom Layer w0.635: IC12.8 130.69,80.315 133.097,80.315 IC12.10 135.891,83.109 142.494,83.109 145.923,86.538 145.923,90.593 138.295,90.593 IC12.4 135.637,87.935 133.23,87.935 IC12.6
NetIC12_5: IC12.5 P14.3 | length 23.6
  Top Layer w0.635: P14.3 124.142,99.568 130.886,99.568 132.918,97.536 132.918,90.787 IC12.5
NetIC12_7: IC12.7 P15.3 | length 22.7
  Top Layer w0.635: P15.3 111.638,96 113.41,94.228 124.396,94.228 IC12.7
NetIC12_9: IC12.9 P16.3 | length 41
  Bottom Layer w0.635: P16.3 124.993,81 127.178,83.185 130.36,83.185 IC12.9
NetIC12_11: IC12.11 P17.3 | length 58.2
  Top Layer w0.635: P17.3 106.133,96 106.489,95.644 106.489,90.716 106.731,90.475 108.712,90.475 109.423,91.186 109.423,93.04 109.728,93.345 111.76,93.345 112.039,93.066 112.039,82.601 114.452,80.188 135.51,80.188 IC12.11
NetIC12_13: IC12.13 R123.1 | length 55.7
  Top Layer w0.635: R123.1 101.425,92.725 102.108,93.408 104.902,93.408 105.295,93.015 105.295,89.611 105.893,89.014 105.893,81.153 v1(108.255,78.791)
  Bottom Layer w0.635: v1(108.255,78.791) 139.191,78.791 142.052,81.652 IC12.13
NetIC12_14: IC12.14 R122.1 | length 84.3
  Top Layer w0.635: R122.1 107.857,92.227 107.59,92.227 107.59,97.922 106.858,98.654 106.858,102.616 108.204,103.962 113.157,103.962 120.895,111.7 144.078,111.7 146.812,108.966 146.812,83.87 IC12.14
NetP1_2: 
NetP2_1A_2: 
NetP2_1B_2: 
NetP2_3A_1: 
NetP2_3A_3: 
NetP2_3B_1: 
NetP2_3B_3: 
NetP2_4A_2: 
NetP2_4B_2: 
NetP4_1: 
NetP4_2: 
NetP5_2: 
NetP6_1: 
NetP6_3: 
NetP8_1: 
NetP8_3: 
NetP13_1: 
"NetPIN 14_1": "L in.1" R107.1 | length 12.4
  Top Layer w0.635: 85,106.2 91.059,100.141 91.059,96.351 R107.1
"NetPIN 14_2": "L in.2" R108.1 | length 13.1
  Top Layer w0.635: 80,106.2 87.884,98.316 87.884,96.351 R108.1
"NetPIN 14_3": "L in.3" R44.1 | length 13.8
  Top Layer w0.635: 75,106.2 84.201,96.351 R44.1
"NetPIN 14_4": "L in.4" R43.1 | length 15
  Top Layer w0.635: 70,106.2 79.849,96.351 R43.1
"NetPIN 14_5": "L in.5" R42.1 | length 16.5
  Top Layer w0.635: 65,106.2 66.605,106.2 76.454,96.351 R42.1
"NetPIN 14_6": "L in.6" R41.1 | length 18.2
  Top Layer w0.635: 60,106.2 69.849,96.351 R41.1
"NetPIN 15_1": "R in.1" R109.1 | length 18.9
  Top Layer w0.635: 59.177,43.122 61.165,45.11 65.437,45.11 72.136,51.809 R109.1
"NetPIN 15_2": "R in.2" R110.1 | length 17.3
  Top Layer w0.635: 64.177,43.122 65.779,43.122 71.679,49.022 74.81,49.022 77.597,51.809 R110.1
"NetPIN 15_3": "R in.3" R94.1 | length 15.7
  Top Layer w0.635: 69.177,43.122 71.558,45.503 73.933,45.503 80.239,51.809 R94.1
"NetPIN 15_4": "R in.4" R92.1 | length 14.2
  Top Layer w0.635: 74.177,43.122 78.756,47.701 79.712,47.701 83.82,51.809 R92.1
"NetPIN 15_5": "R in.5" R91.1 | length 13.2
  Top Layer w0.635: 79.177,43.122 86.335,50.28 86.335,51.276 86.868,51.809 R91.1
"NetPIN 15_6": "R in.6" R90.1 | length 11.8
  Top Layer w0.635: 84.177,43.122 91.592,50.538 91.592,51.809 R90.1
"NetPIN 17_1": 
"NetPIN 17_2": 
"NetPIN 19_1": 
"NetPIN 19_2": 
NetR58_2: R58.2 XLR_male1.3 | length 10.6
  Top Layer w0.635: XLR_male1.3 43.434,92.078 R58.2
NetR105_2: R105.2 XLR_male2.3 | length 10.4
  Top Layer w0.635: XLR_male2.3 45.171,51.097 R105.2
VCC: C33.2 C42.2 D7.1 D8.1 D9.1 D10.1 D14.1 D15.1 D16.1 D17.1 IC4.8 IC5.8 IC8.8 IC9.8 IC11.3 IC12.3 P9.1 P10.1 P11.1 P12.1 P14.1 P15.1 P16.1 P17.1 Power.2 R60.1 | length 365.1
  Top Layer w0.635: C42.2 C42.2@54.7,60.3 ; IC5.8@58.673,88.457 58.69,88.475 IC5.8 56.791,88.9 56.591,88.7 C33.2 C42.2@54.7,60.3 ; IC9.8 58.846,65.549 56.109,62.812 56.109,61.709 C42.2@54.7,60.3 ; IC4.8 78.685,82.321 79.604,82.321 80.645,81.28 80.645,71.755 ; IC8.8 80.645,64.914 80.645,71.755 ; P9.1 92.837,58.6 97.419,63.182 R60.1@97.419,71.552 ; R60.1 R60.1@97.419,71.552 ; P17.1 99.06,104.142 96.426,104.142 94.9,102.616 P16.1 ; D17.1 D17.1@101.228,84.672 ; P12.1 106.68,45.446 106.68,64.188 D7.1 98.552,71.552 ; 80.645,71.755 92.227,83.337 93.472,83.337 94.996,84.861 94.996,86.868 94.9,86.964 P16.1 ; P16.1 D17.1@101.228,84.672 ; R60.1@97.419,71.552 98.552,71.552 ; 98.552,71.552 99.822,72.822 99.822,83.91 100.584,84.672 D17.1@101.228,84.672
  Bottom Layer w0.635: C42.2 72.4,60.2 73,60.8 88.9,60.8 P9.1 P9.1@90.8,58.9 ; P10.1 97.883,43.663 105.334,43.663 P12.1 108.9,43.663 116.473,43.663 P11.1 ; P17.1 102.69,107.772 110.163,107.772 P15.1 113.707,107.772 121.302,107.772 P14.1 ; D17.1 103.192,83.287 106.581,83.287 D16.1 109.454,83.185 112.731,83.185 D15.1 115.651,83.337 118.983,83.337 D14.1 122.133,86.487 136.729,86.487 IC12.3 ; D7.1 105.745,67.92 109.009,67.92 D8.1 112.081,67.996 115.372,67.996 D9.1 118.137,67.812 120.986,67.812 122.377,66.421 D10.1 124.118,65.21 130.566,65.21 IC11.3 136.68,59.096 152.453,59.096 152.557,58.991 Power.2
VEE: D11.2 IC4.4 IC5.4 IC8.4 IC9.4 Power.3 | length 178.2
  Top Layer w0.635: IC5.4 62.8,83.12 62.88,83.2 v1(64.1,83.2) ; IC9.4 62.656,60.96 64.465,60.96 67.564,64.059 67.564,72.009 v1(68.605,73.05) ; v1(73.6,86.6) 74.099,86.6 74.875,87.376 IC4.4 ; IC8.4 84.961,60.655 91.006,66.7 94.59,66.7 95.961,68.072 95.961,74.776 D11.2
  Bottom Layer w0.635: v1(64.1,83.2) 64.1,83.028 64.8,82.328 64.8,76.856 v1(68.605,73.05) ; v1@68.777,73.05 94.236,73.05 D11.2 ; v1(73.6,86.6) 77.8,86.6 80.5,83.9 80.5,80.4 82.5,78.4 95.028,78.4 D11.2 ; Power.3 153.34,64.66 152.369,64.66 141.566,75.462 140.803,76.226 97.411,76.226 D11.2
pads on no net: P9. P10. P11. P12. P14. P15. P16. P17.

## Silkscreen, mask and mechanical layers (free items; w line width, h text height)
Top Overlay:
  lines w0.127: 99.607,86.021 100.407,86.021 ; 100.007,85.621 100.007,86.421 ; 125.207,66.421 126.007,66.421 ; 125.607,66.021 125.607,66.821
  text "4" at 70.954,112.373 h0.76 r180
  text "6" at 60.854,112.273 h0.76 r180
  text "5" at 65.754,112.273 h0.76 r180
  text "3" at 74.954,112.273 h0.76 r180
  text "2" at 80.054,112.273 h0.76 r180
  text "6" at 159.273,94.846 h0.76 r90
  text "5" at 159.273,89.846 h0.76 r90
  text "3" at 159.273,78.946 h0.76 r90
  text "2" at 159.273,74.146 h0.76 r90
  text "-12V" at 159.273,62.967 h0.76 r90
  text "+12V" at 159.273,57.867 h0.76 r90
  text "GND" at 159.273,52.984 h0.76 r90
  text "2" at 64.546,37.127 h0.76
  text "3" at 69.641,37.127 h0.76
  text "4" at 73.646,37.127 h0.76
  text "5" at 78.846,37.127 h0.76
  text "6" at 83.746,37.127 h0.76